# Altium PCB PCB_Logette connecté_2023-11-30.pcbdoc
Units mm, origin at the board's own origin, x right, y up, seen from the top; angles counter-clockwise.
Board outline 247.62 x 164.07 mm, 2 copper layers (Top Layer, Bottom Layer); 53 components, 73 nets, 275 pads, 114 vias.
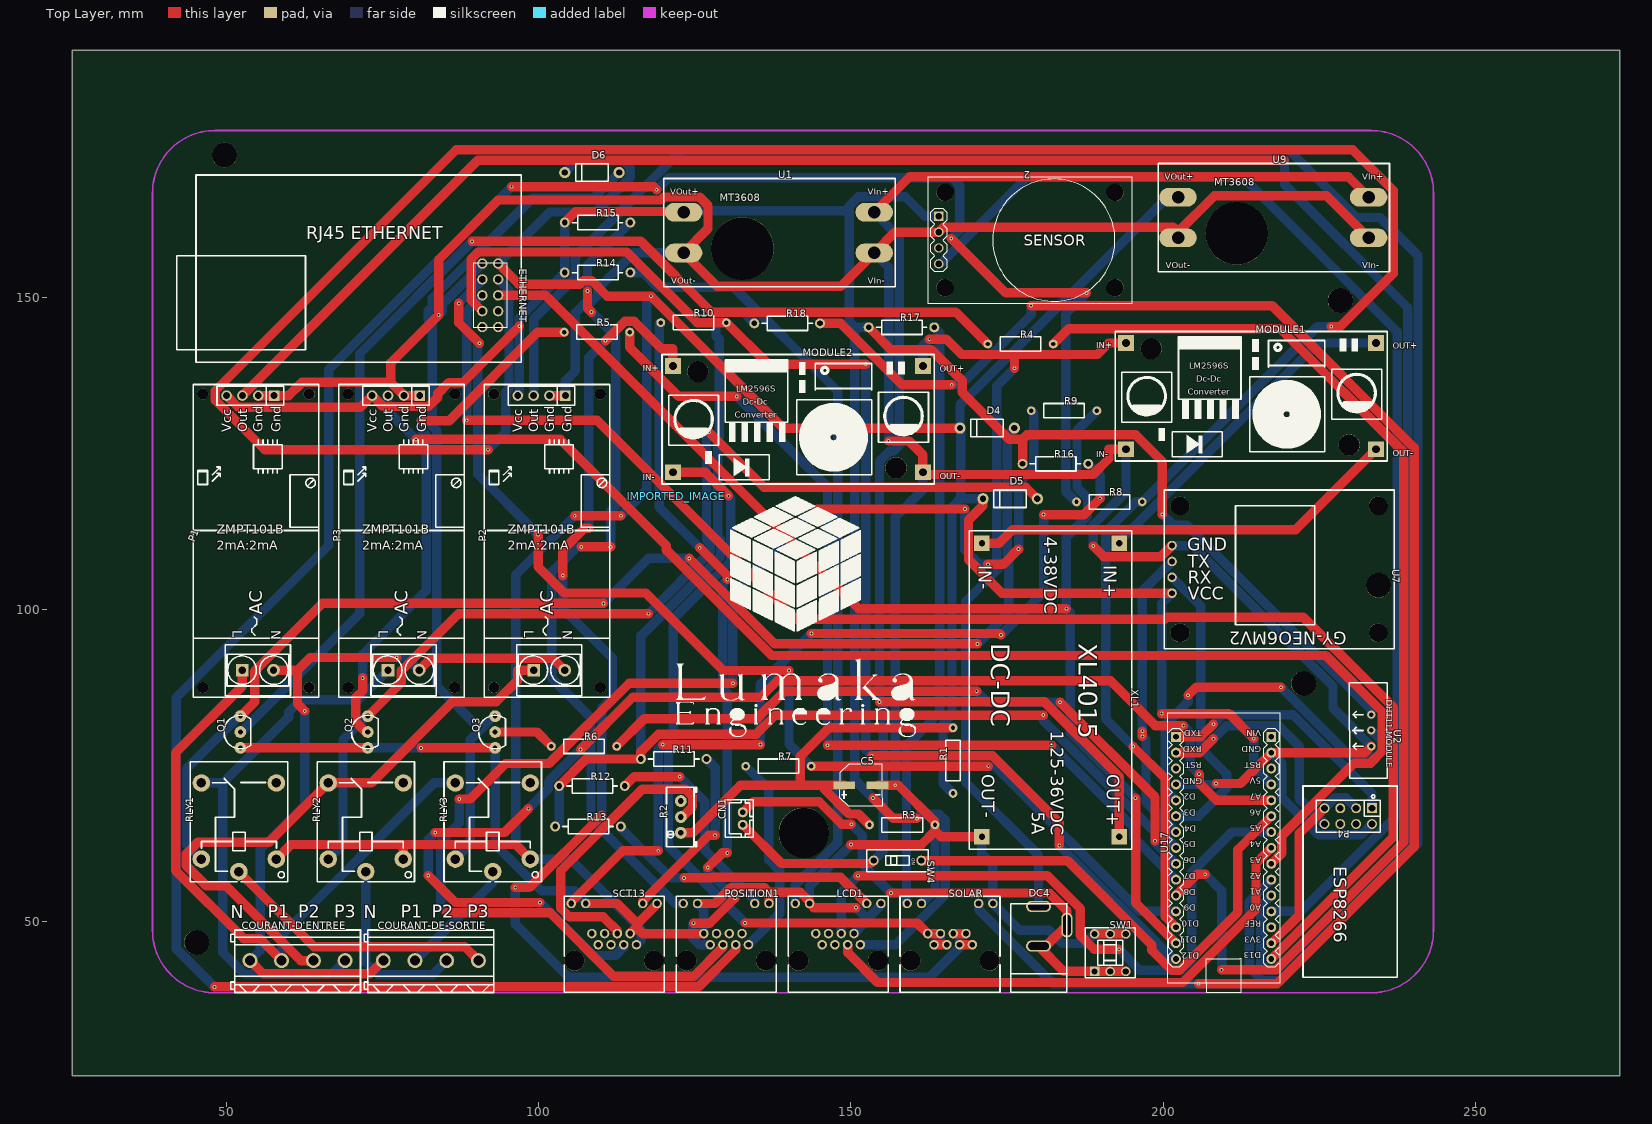
[diagram p0: Top Layer view]
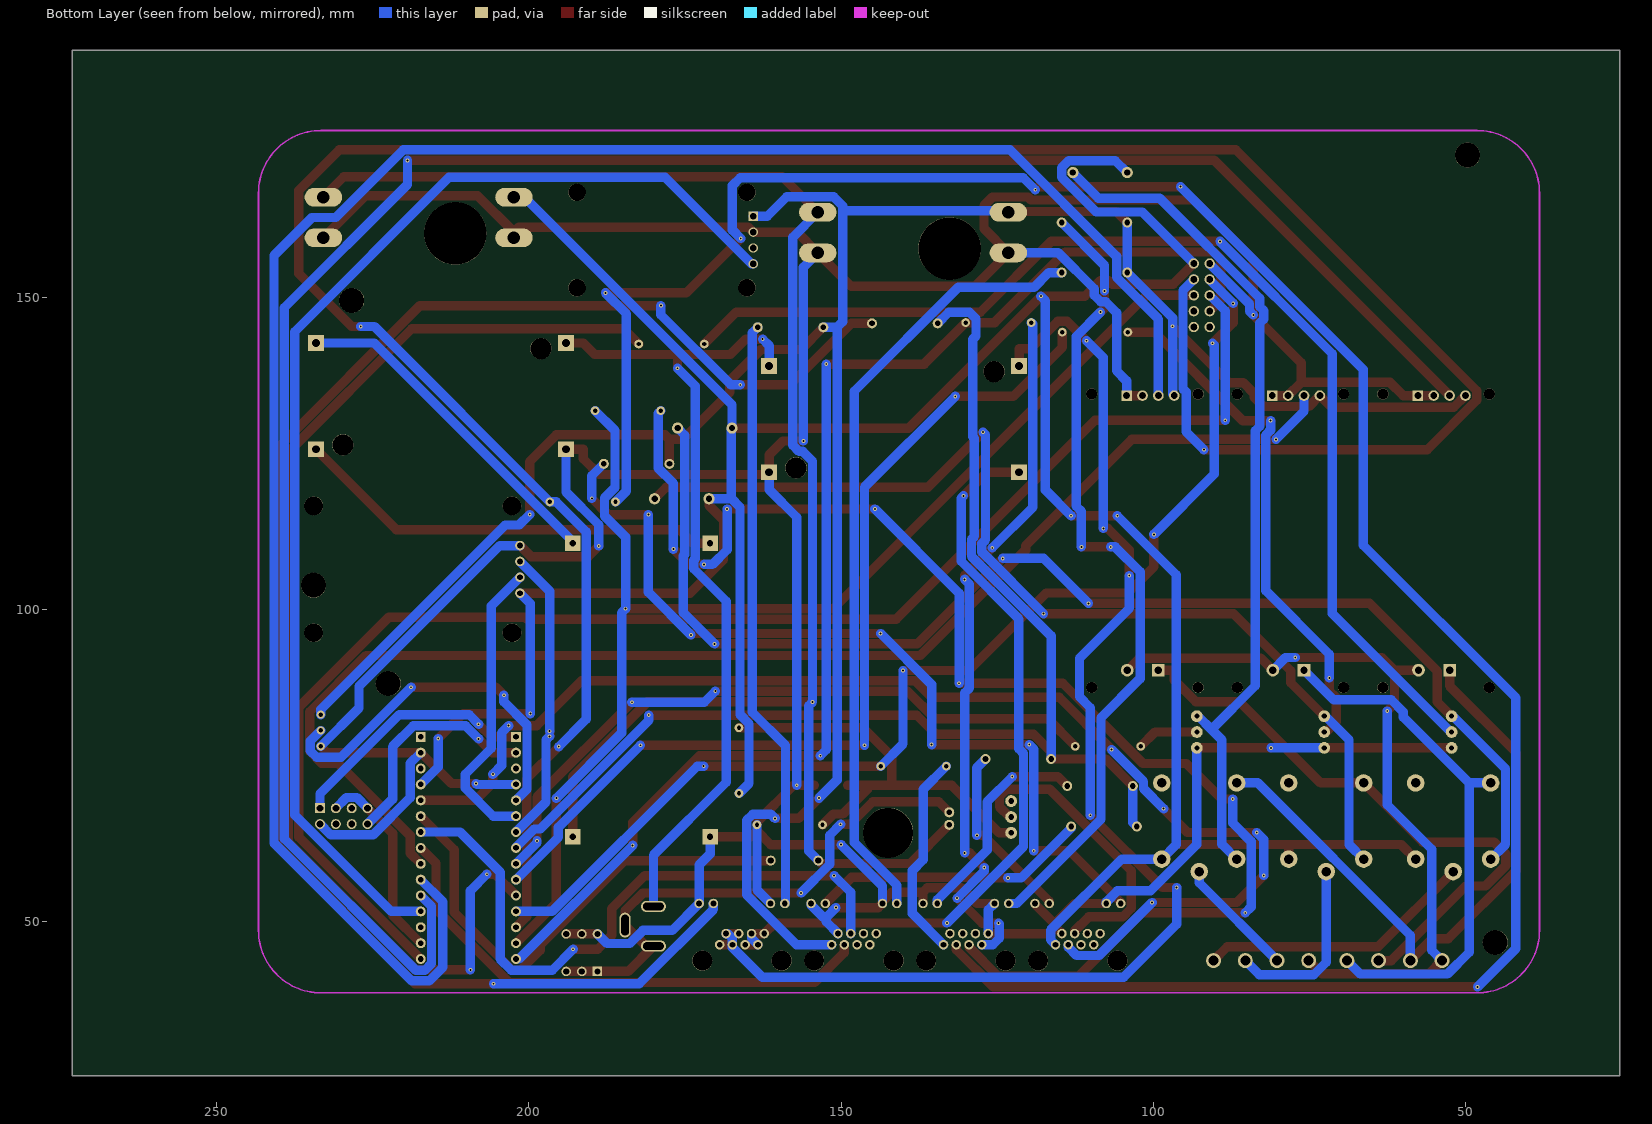
[diagram p1: Bottom Layer view, seen from below]

## Layer stack, top to bottom
Top Layer: signal copper (thickness not stored)
Dielectric: dielectric 0.32, FR-4, Dk 4.8
Bottom Layer: signal copper (thickness not stored)

## Board outline
273.016,25.4 25.4,25.4 25.4,189.469 273.016,189.469

## Components (designator, comment, footprint, x,y, rotation, side; value= is the part's Value field where it differs from the comment)
2 "GAS-SENSOR-MQ2" GAS-SENSOR-MQ2 178.656,159.116 r0 top
C5 "100uF" CAP-SMD_BD6.3-L6.6-W6.6-FD 151.605,71.867 r0 top
CN1 "B2B-PH-K-S(LF)(SN)" CONN-TH_B2B-PH-K-S 132.682,66.533 r90 top
COURANT-D'ENTREE "DB128L-5.0-4P-BU-S" CONN-TH_4P-5.00_DB128L-5.0-4P-BU-S 61.435,43.8 r0 top
COURANT-DE-SORTIE "DB128L-5.0-4P-BU-S" CONN-TH_4P-5.00_DB128L-5.0-4P-BU-S 82.771,43.8 r0 top
D4 "1N4007" DO-41_BD2.4-L4.7-P8.70-D0.9-RD 171.798,129.017 r0 top
D5 "1N4007" DO-41_BD2.4-L4.7-P8.70-D0.9-RD 175.481,117.714 r0 top
D6 "1N4007" DO-41_BD2.4-L4.7-P8.70-D0.9-RD 108.552,169.911 r0 top
DC4 "DC-072-165A" DC-IN-TH_DC-072-165A 182.296,49.293 r90 top
ETHERNET "W5100 Ethernet Shield" "W5100 ETHERNET MINI" 92.169,151.496 r270 top
IMPORTED_IMAGE "IMPORTED_IMAGE" IMPORTED_IMAGE 122.006,118.118 r0 top
LCD1 "MJ5688-Y011-GRNL1" RJ45-TH_MJ5688-Y011-GRNL1 147.941,49.642 r0 top
MODULE1 "LM2596S" LM2596S 213.327,133.335 r0 top
MODULE2 "LM2596S" LM2596S 140.81,129.652 r0 top
P1 "ZMPT101B-SHIELD COPY" ZMPT101B-MODULE 44.734,85.964 r90 top
P2 "ZMPT101B-SHIELD COPY" ZMPT101B-MODULE 91.343,85.964 r90 top
P3 "ZMPT101B-SHIELD COPY" ZMPT101B-MODULE 68.039,85.964 r90 top
P4 "ESP8266-TH8" HDR-TH_8P-P2.54-V-F-R2-C4-S2.54-1 229.583,66.914 r180 top
POSITION1 "MJ5688-Y011-GRNL1" RJ45-TH_MJ5688-Y011-GRNL1 130.024,49.642 r0 top
Q1 "BC547" TO92C 52.291,80.376 r90 top
Q2 "BC547" TO92C 72.674,80.376 r90 top
Q3 "BC547" TO92C 93.058,80.376 r90 top
R1 "10kΩ" RES-TH_BD2.3-L6.5-P10.50-D0.5 166.337,75.804 r90 top
R2 "100kΩ" RES-ADJ-TH_3P-L9.5-W4.9-P2.50-L_3296W 122.776,66.787 r90 top
R3 "10kΩ" RES-TH_BD2.3-L6.5-P10.50-D0.5 158.209,65.517 r0 top
R4 "10kΩ" RES-TH_BD2.3-L6.5-P10.50-D0.5 177.132,142.479 r0 top
R5 "10kΩ" RES-TH_BD2.3-L6.5-P10.50-D0.5 109.341,144.384 r0 top
R6 "10kΩ" RES-TH_BD2.3-L6.5-P10.50-D0.5 107.282,78.09 r0 top
R7 "10kΩ" RES-TH_BD2.3-L6.5-P10.50-D0.5 138.397,74.915 r0 top
R8 "10kΩ" RES-TH_BD2.3-L6.5-P10.50-D0.5 191.356,117.206 r0 top
R9 "10kΩ" RES-TH_BD2.3-L6.5-P10.50-D0.5 184.117,131.811 r0 top
R10 "10kΩ" RES-TH_BD2.3-L6.5-P10.50-D0.5 124.808,145.908 r0 top
R11 "220Ω" RES-TH_BD2.2-L6.5-P10.50-D0.6 121.633,76.058 r0 top
R12 "220Ω" RES-TH_BD2.2-L6.5-P10.50-D0.6 108.552,71.74 r0 top
R13 "220Ω" RES-TH_BD2.2-L6.5-P10.50-D0.6 107.917,65.263 r0 top
R14 "220Ω" RES-TH_BD2.2-L6.5-P10.50-D0.6 109.441,153.909 r0 top
R15 "220Ω" RES-TH_BD2.2-L6.5-P10.50-D0.6 109.441,161.91 r0 top
R16 "220Ω" RES-TH_BD2.2-L6.5-P10.50-D0.6 182.72,123.302 r0 top
R17 "220Ω" RES-TH_BD2.2-L6.5-P10.50-D0.6 158.082,145.146 r0 top
R18 "220Ω" RES-TH_BD2.2-L6.5-P10.50-D0.6 139.794,145.781 r0 top
RLY1 "SRD-05VDC-SL-C" RELAY-TH_SRD-XXVDC-XL-C 52.037,65.136 r90 top
RLY2 "SRD-05VDC-SL-C" RELAY-TH_SRD-XXVDC-XL-C 72.357,65.136 r90 top
RLY3 "SRD-05VDC-SL-C" RELAY-TH_SRD-XXVDC-XL-C 92.677,65.136 r90 top
SCT13 "MJ5688-Y011-GRNL1" RJ45-TH_MJ5688-Y011-GRNL1 112.108,49.642 r0 top
SOLAR "MJ5688-Y011-GRNL1" RJ45-TH_MJ5688-Y011-GRNL1 165.857,49.642 r0 top
SW1 "XKB8080-Z" SW-TH_6P-L8.0-W8.0-P2.50 191.483,45.07 r0 top
SW4 "DS-01RP_C319063" SW-TH_DS-01RP 157.447,59.802 r270 top
U1 "MT3608" MT3608 138.524,160.259 r0 top
U2 "DHT11 MODULE (3PIN)" "DHT11 MODULE 3P" 233.266,80.63 r270 top
U7 "GY-NEO6MV2" GY-NEO6MV2 201.389,110.221 r270 top
U9 "MT3608" MT3608 217.645,162.672 r0 top
U17 "ARDUINO_NANO" COMM-TH_ARDUINO_NANO 209.644,61.834 r90 top
XL1 "DC-DC XL4015" DC-DC_XL4015_5A 181.958,87.107 r270 top

## Footprints (in the part's own frame and the unit in brackets; to place one, negate y for a bottom-side part, rotate by r counter-clockwise, add the part's x,y. Pads: shape width x height; smd on the part's side, far side on the other; paste and mask are expansions set on the pad)
CAP-SMD_BD6.3-L6.6-W6.6-FD [mm]
  rect 3.5x1.2 smd paste+0 mask+0.051: 1(-2.67,0) 2(2.67,0)
  silkscreen extent -3.38,-3.38 3.38,3.38
COMM-TH_ARDUINO_NANO [mm]
  rect 1.6x1.6 hole 0.9 paste+0 mask+0.051: 1(17.78,7.62) 30(17.78,-7.62)
  round 1.6 hole 0.9 paste+0 mask+0.051: 2(15.24,7.62) 3(12.7,7.62) 4(10.16,7.62) 5(7.621,7.62) 6(5.08,7.62) 7(2.541,7.62) 8(0,7.62) 9(-2.539,7.62) 10(-5.08,7.62) 11(-7.619,7.62) 12(-10.16,7.62) 13(-12.699,7.62) 14(-15.24,7.62) 15(-17.78,7.62) 16(-17.78,-7.62) 17(-15.241,-7.62) 18(-12.7,-7.62) 19(-10.161,-7.62) 20(-7.62,-7.62) 21(-5.081,-7.62) 22(-2.54,-7.62) 23(-0.001,-7.62) 24(2.54,-7.62) 25(5.079,-7.62) 26(7.62,-7.62) 27(10.159,-7.62) 28(12.7,-7.62) 29(15.24,-7.62)
  silkscreen extent -23.11,-8.97 21.67,8.97
CONN-TH_4P-5.00_DB128L-5.0-4P-BU-S [mm]
  round 2.4 hole 1.6 paste+0 mask+0.051: 1(-7.62,0) 2(-2.54,0) 3(2.54,0) 4(7.62,0)
  silkscreen extent -10.67,-5.1 10.07,4.9
CONN-TH_B2B-PH-K-S [mm]
  round 1.6 hole 0.9 paste+0 mask+0.051: 1(1,0) 2(-1,0)
  silkscreen extent -3,-1.7 3,2.8
DC-DC_XL4015_5A [mm]
  rect 2.5x2.5 hole 1 paste+0 mask+0.051: 1(-23.5,11) 2(-23.5,-11) 3(23.5,11) 4(23.5,-11)
  silkscreen extent -25.5,-13 25.5,13
DC-IN-TH_DC-072-165A [mm]
  oval 1.8x4 hole 1.2 slot 3.3 at 90 deg paste+0 mask+0.051: 1(3.175,2.273) 2(-3.175,2.273)
  oval 4x1.8 hole 1.2 slot 3.3 at 0 deg paste+0 mask+0.051: 3(0.178,-2.273)
  silkscreen extent -10.59,-2.28 3.58,6.73
"DHT11 MODULE 3P" [mil]
  round 51 hole 28 paste+0 mask+4: 1(-100,0) 2(0,0) 3(100,0)
  silkscreen extent -300,-140 300,100
DO-41_BD2.4-L4.7-P8.70-D0.9-RD [mm]
  round 1.8 hole 1 paste+0 mask+0.051: 1(-4.35,0) 2(4.35,0)
  silkscreen extent -2.6,-1.4 2.6,1.4
GAS-SENSOR-MQ2 [mil]
  rect 59.37x59.37 hole 39.36 paste+0 mask+2: 1(-575,150)
  round 59.37 hole 39.36 paste+0 mask+2: 2(-575,50) 3(-575,-50) 4(-575,-150)
  round 110.24 hole 110.24 unplated paste+0: ""(-535,-300) ""(-535,300) ""(535,-300) ""(535,300)
  silkscreen extent -640,-400 640,400
GY-NEO6MV2 [mm]
  round 1.524 hole 0.914 paste+0 mask+0.051: 1(0,0) 2(2.54,0) 3(5.08,0) 4(7.62,0)
  round 3 hole 3 unplated paste+0: ""(-6.35,33.02) ""(-6.35,1.27) ""(13.97,33.02) ""(13.97,1.27)
  round 4 hole 4 unplated paste+0: ""(6.35,33.02)
  silkscreen extent -8.89,-1.27 16.51,35.56
HDR-TH_8P-P2.54-V-F-R2-C4-S2.54-1 [mm]
  rect 1.6x1.6 hole 1.1 paste+0 mask+0.051: 1(-3.81,-1.27)
  round 1.6 hole 1.1 paste+0 mask+0.051: 2(-3.81,1.27) 3(-1.27,-1.27) 4(-1.27,1.27) 5(1.27,-1.27) 6(1.27,1.27) 7(3.81,-1.27) 8(3.81,1.27)
  silkscreen extent -5.1,-3.42 5.1,2.55
IMPORTED_IMAGE [mm]
  silkscreen extent 0,-38.52 38.39,0
LM2596S [mm]
  rect 2.54x2.54 hole 1.27 paste+0 mask+0.102: 1(-19.3,9.3) 2(-19.3,-7.7) 3(20.7,9.3) 4(20.7,-7.7)
  round 3.4 hole 3.4 unplated paste+0: ""(-15.3,8.4) ""(16.4,-7)
  silkscreen extent -21.05,-9.58 22.51,11.15
MT3608 [mm]
  oval 6x3 hole 2 paste+0 mask+0.102: 1(15.2,-3.2) 2(15.2,3.3) 3(-15.3,-3.2) 4(-15.3,3.3)
  round 10 hole 10 unplated paste+0: ""(-5.9,-2.5)
  silkscreen extent -18.45,-8.6 18.55,8.7
RELAY-TH_SRD-XXVDC-XL-C [mil]
  round 110 hole 60 paste+0 mask+2: 1(-200.79,-236.22) 2(279.52,-236.2) 3(279.53,236.2) 4(-200.79,236.22) 5(-279.53,0)
  silkscreen extent -342,-307 413,307
RES-ADJ-TH_3P-L9.5-W4.9-P2.50-L_3296W [mm]
  round 1.9 hole 0.9 paste+0 mask+0.051: 1(-2.55,0) 2(-0.01,0) 3(2.55,0)
  silkscreen extent -4.75,-2.54 4.75,2.3
RES-TH_BD2.2-L6.5-P10.50-D0.6 [mm]
  round 1.6 hole 0.914 paste+0 mask+0.051: 1(-5.25,0) 2(5.25,0)
  silkscreen extent -4.06,-1.14 4.06,1.14
RES-TH_BD2.3-L6.5-P10.50-D0.5 [mm]
  round 1.4 hole 0.7 paste+0 mask+0.051: 1(-5.25,0) 2(5.25,0)
  silkscreen extent -3.25,-1.15 3.25,1.15
RJ45-TH_MJ5688-Y011-GRNL1 [mil]
  round 60 hole 36 paste+0 mask+1.97: 1(140.55,-129.92) 2(100.39,-59.84) 3(60.24,-129.92) 4(20.08,-59.84) 5(-20.08,-129.92) 6(-60.24,-59.84) 7(-100.39,-129.92) 8(-140.55,-59.84) 9(-270.08,129.92) 10(-179.92,129.92) 11(179.92,129.92) 12(270.08,129.92)
  round 125.98 hole 125.98 unplated paste+0: ""(-250,-229.92) ""(250,-229.92)
  silkscreen extent -315,-431 315,175
SW-TH_6P-L8.0-W8.0-P2.50 [mm]
  rect 1.524x1.524 hole 1 paste+0 mask+0.051: 1(-2.5,-3)
  round 1.524 hole 1 paste+0 mask+0.051: 2(0,-3) 3(2.5,-3) 4(-2.5,3) 5(0,3) 6(2.5,3)
  silkscreen extent -4,-4 4,4
SW-TH_DS-01RP [mm]
  round 1.6 hole 1 paste+0 mask+0.051: 1(0,-3.81) 2(0,3.81)
  silkscreen extent -1.75,-4.9 1.75,4.9
TO92C [mil]
  round 74 hole 32 paste+0 mask+2: 1(-100,0) 2(0,0) 3(100,0)
  silkscreen extent -105,-65 105,103
"W5100 ETHERNET MINI" [mil]
  round 65 hole 40 slot 40.2 at 0 deg paste+0 mask+2: 5V(-152,54) GND_1(-152,-46) GND_2(148,54) MI(148,-46) MO(48,54) NSS(-52,54) POE+(248,-46) POE-(248,54) RST(-52,-46) SOK(48,-46)
  silkscreen extent -710,-1970 470,200
ZMPT101B-MODULE [mil]
  rect 80x80 hole 46 paste+0 mask+2: 1(170,-310)
  round 80 hole 46 paste+0 mask+2: 2(170,-506)
  round 66.93 hole 43.31 paste+0 mask+2: 3(1900,-210)
  round 66.93 hole 43.31 paste+0 mask+4: 4(1900,-310) 5(1900,-410)
  rect 66.93x66.93 hole 43.31 paste+0 mask+4: 6(1900,-510)
  round 70.87 hole 70.87 unplated paste+0: ""(60,-60) ""(60,-730) ""(1910,-730) ""(1910,-60)
  silkscreen extent 0,-790 1970,0

## Free pads (board coordinates)
  round 4 hole 4 unplated paste+0: ""(45.306,46.721) ""(49.751,172.705) ""(222.471,88.123) ""(228.313,149.464)
  round 8 hole 8 unplated paste+0: ""(142.461,64.247)

## Via types
v1: diameter 0.61, hole 0.305, Top Layer to Bottom Layer, tented both sides, 114 vias

## Nets (pads, with @x,y where several pads share a name; then routed paths per layer and width w, separated by ;. In a path a pad name is that pad's centre, name@x,y a point inside that pad or via, vN(x,y) a via of type N, cw(c..) or ccw(c..) an arc to the next point about the centre after c; other vN are vias at no path point)
3V: P4.3 P4.7 U17.17 | length 31.6
  Top Layer w1.5: U17.17 221.768,51.098 221.768,64.179 P4.7
  Bottom Layer w1.5: P4.7 227.486,69.896 229.14,69.896 P4.3
12V: DC4.1 MODULE1.1 MODULE2.3 | length 134.6
  Top Layer w1.5: v1(162.543,143.252) 165.271,143.252 167.719,140.805 176.168,140.805 ; v1(176.168,138.591) 176.168,140.805 ; MODULE1.1 191.256,142.635 189.426,140.805 176.168,140.805
  Bottom Layer w1.5: MODULE2.3 161.51,142.219 v1(162.543,143.252) ; v1(176.168,138.591) 173.343,135.765 173.343,108.119 173.573,107.888 173.573,106.518 168.381,101.326 168.381,72.326 180.023,60.685 DC4.1
+: 2.1 LCD1.1 P1.3 P2.3 P3.3 R14.1 R15.1 R16.1 R17.1 U1.4 U2.1 | length 406.4
  Top Layer w1.5: P1.3 51.947,132.345 71.494,132.345 P3.3 75.128,132.469 82.364,132.469 83.897,134.003 83.897,134.573 85.606,136.282 87.886,136.282 v1(96.931,145.327) ; R15.1 105.972,163.69 123.092,163.69 U1.4 ; R17.1 156.379,141.599 162.825,141.599 167.791,136.633 167.791,134.764 175.342,127.213 177.47,127.213 ; v1(153.522,69.808) 156.77,66.56 v1(160.55,66.56) ; R16.1 177.47,127.213 ; v1@199.826,115.2 199.826,123.664 195.564,127.926 178.183,127.926 177.47,127.213
  Bottom Layer w1.5: P2.3 96.931,134.477 v1(96.931,145.327) 96.931,146.649 R14.1 R15.1 ; U1.4 123.475,163.809 149.719,163.809 ; LCD1.1 157.128,46.342 165.122,54.335 165.122,66.251 164.14,67.232 161.222,67.232 v1(160.55,66.56) ; R17.1 150.633,145.146 ; v1(153.522,69.808) 150.633,72.697 150.633,145.146 ; 2.1 161.796,162.926 158.689,166.033 151.191,166.033 149.719,164.561 149.719,163.809 ; v1@199.826,115.2 201.521,113.505 203.746,113.505 233.266,83.985 U2.1 ; 149.719,163.809 149.719,146.06 150.633,145.146
  other v1: 199.826,115.2
-: 2.2 C5.2 ETHERNET.GND_1 LCD1.2 LCD1.10 LCD1.12 MODULE1.2 MODULE2.4 P1.5 P1.6 P2.5 P2.6 P3.5 P3.6 P4.2 POSITION1.8 POSITION1.10 POSITION1.12 Q1.1 Q2.1 Q3.1 R3.2 SCT13.2 SCT13.10 SCT13.12 SOLAR.10 SOLAR.12 SW1.4 SW1.5 SW1.6 U1.1 U1.3 U2.3 U7.1 U9.1 U9.3 U17.4 U17.29 XL1.4 | length 787.9
  Top Layer w1.5: Q1.1 Q2.1 ; P1.5 P1.6 60.04,134.224 62.153,136.336 76.34,136.336 ; P3.6 P3.5 76.34,136.336 ; v1(81.188,77.836) Q3.1 ; P2.5 P2.6 ; SCT13.10 112.586,52.942 115.847,49.681 ; SCT13.2 115.464,48.928 115.847,48.928 ; SCT13.12 118.968,52.801 115.847,49.681 ; POSITION1.10 128.233,52.942 130.736,55.445 136.189,55.445 136.884,54.749 ; POSITION1.8 116.654,48.122 115.847,48.928 ; POSITION1.12 136.884,54.749 ; v1(149.992,62.355) 161.252,62.355 163.459,64.562 ; v1(150.807,52.277) 144.036,52.277 LCD1.10 143.371,53.276 141.898,54.749 136.884,54.749 ; C5.2 155.9,71.867 v1(157.086,71.867) 157.526,71.867 157.583,71.867 163.459,65.991 R3.2 163.459,64.562 ; v1(156.029,126.947) 159.285,126.947 161.51,124.722 MODULE2.4@161.51,122.171 ; MODULE2.4@161.51,121.952 MODULE2.4@161.51,122.171 ; XL1.4 164.414,63.607 163.459,64.562 ; v1(188.776,110.146) 190.47,108.453 199.621,108.453 U7.1 ; SW1.4 SW1.5 SW1.6 ; MODULE1.2 191.256,125.635 191.256,124.12 188.734,121.597 162.084,121.597 MODULE2.4@161.51,122.171 ; U9.3 U9.3@202.345,160.386 ; v1@208.431,72.146 212.336,72.146 U17.29 232.25,77.074 U2.3 ; U9.1 226.096,166.221 208.18,166.221 U9.3@202.345,160.386 ; 76.34,136.336 76.34,139.457 84.022,147.139 84.022,155.973 93.566,165.517 119.597,165.517 120.082,166.002 125.753,166.002 127.13,164.625 127.13,160.965 U1.3 128.555,151.728 148.393,151.728 U1.1 157.051,160.386 2.2 164.856,161.191 201.54,161.191 U9.3@202.345,160.386 ; 115.847,48.928 115.847,49.681
  Bottom Layer w1.5: Q2.1 v1(81.188,77.836) ; v1@84.022,147.139 84.63,147.747 84.63,148.891 91.001,155.262 ETHERNET.GND_1 ; Q3.1 93.058,62.382 100.48,54.961 105.772,54.961 107.538,53.194 SCT13.10 ; P2.6 104.297,136.575 105.906,138.184 105.906,147.483 107.655,149.232 108.435,149.232 109.488,150.285 109.488,151.331 115.216,157.059 U1.3 ; POSITION1.10 126.454,51.942 POSITION1.8 ; LCD1.10 143.371,55.734 v1(149.992,62.355) ; LCD1.2 152.381,50.012 152.381,50.702 ; v1(150.807,52.277) 152.381,50.702 ; U1.1 156.029,154.754 v1(156.029,126.947) ; LCD1.12 154.801,52.687 152.816,50.702 152.381,50.702 ; v1(157.086,71.867) 157.086,114.757 161.51,119.181 MODULE2.4@161.51,121.952 ; SOLAR.10 163.459,55.113 R3.2 ; XL1.4 170.958,60.856 172.717,59.097 SOLAR.12 177.026,48.633 181.708,48.633 183.814,46.527 187.44,46.527 SW1.4 ; v1(188.776,110.146) 188.776,113.538 194.027,118.789 194.027,122.864 MODULE1.2 ; U7.1 204.617,110.221 227.139,87.699 227.139,84.217 U2.3 ; U17.4 202.038,71.979 208.264,71.979 v1@208.431,72.146 ; U17.29 218.968,75.37 218.968,69.867 224.916,63.919 231.669,63.919 P4.2
  other v1: 208.431,72.146 84.022,147.139
A0: 2.4 U17.19 | length 193.3
  Bottom Layer w1.5: 2.4 164.325,155.306 178.176,169.157 212.735,169.157 237.436,144.456 237.436,67.109 222,51.674 U17.19
A1: P1.4 U17.20 | length 343.5
  Top Layer w1.5: P1.4 90.25,171.865 v1(219.391,171.865)
  Bottom Layer w1.5: U17.20 215.534,52.484 215.534,43.317 216.615,42.236 218.039,42.236 239.101,63.298 239.101,148.289 219.391,167.999 v1(219.391,171.865)
A2: P2.4 U17.21 | length 320.5
  Bottom Layer w1.5: P2.4 99.217,146.464 105.905,153.152 105.905,156.503 122.962,173.56 220.036,173.56 230.874,162.722 234.683,162.722 240.755,156.65 240.755,62.598 218.711,40.554 215.913,40.554 213.753,42.714 213.753,53.243 U17.21
A3: P3.4 U17.22 | length 215.2
  Top Layer w1.5: v1(80.396,127.218) 103.455,127.218 120.464,110.208 120.464,109.49 137.333,92.621 226.009,92.621 235.022,83.609 235.022,77.289 233.144,75.411 230.565,75.411 218.97,63.816 218.97,60.999 U17.22
  Bottom Layer w1.5: P3.4 75.913,131.701 v1(80.396,127.218)
A6: SW4.2 U17.25 | length 79.9
  Top Layer w1.5: SW4.2 184.645,59.802 198.149,46.298 198.149,45.449 201.348,42.251 202.631,42.251 211.89,51.51 211.89,61.54 U17.25
A7: SCT13.3 U17.26 | length 201.2
  Top Layer w1.5: v1(82.348,57.41) 86.659,53.099 v1(100.223,53.099) ; v1(83.467,64.306) 94.568,64.306 v1(98.374,68.112) ; v1(106.718,77.571) 115.084,85.938 135.561,85.938 138.193,88.57 191.543,88.57 198.701,81.412 v1(203.19,81.412) ; v1@205.713,73.633 205.713,72.251 208.511,69.454 U17.26
  Bottom Layer w1.5: v1(82.348,57.41) 82.348,63.187 v1(83.467,64.306) ; v1(98.374,68.112) 101.598,71.336 101.598,72.452 v1(106.718,77.571) ; v1(100.223,53.099) 108.701,44.621 112.3,44.621 113.638,45.959 SCT13.3 ; v1(203.19,81.412) 204.328,80.274 204.328,75.019 v1@205.713,73.633
  other v1: 205.713,73.633
B+: CN1.2 SW4.1 U1.2 U9.2 XL1.3 | length 267.5
  Top Layer w1.5: CN1.2 138.878,59.336 153.172,59.336 SW4.1 ; U1.2 159.399,169.233 229.583,169.233 U9.2 ; v1(154.563,85.2) 180.997,85.2 192.958,73.239 XL1.3
  Bottom Layer w1.5: SW4.1 155.176,61.34 155.176,84.587 v1(154.563,85.2) 154.563,123.72 156.137,125.293 156.714,125.293 157.708,126.287 157.708,159.575 U1.2
D3: U7.3 U17.6 | length 47.3
  Bottom Layer w1.5: U7.3 205.982,100.548 205.982,77.796 210.155,73.623 210.155,71.423 205.646,66.914 U17.6
D4: U7.2 U17.7 | length 47.5
  Top Layer w1.5: v1(196.646,79.692) v1(196.646,80.519)
  Bottom Layer w1.5: v1(196.646,79.692) 197.212,79.126 197.212,69.185 U17.7 ; v1(196.646,80.519) 196.646,102.938 U7.2
D4_2: D4.2 Q1.3 RLY1.4 | length 201.7
  Top Layer w1.5: Q1.3 54.581,85.205 54.581,90.132 65.422,100.974 v1(110.391,100.974) ; v1(124.12,108.173) 137.807,94.486 v1(170.237,94.486)
  Bottom Layer w1.5: RLY1.4 43.673,62.399 43.673,74.519 52.07,82.916 Q1.3 ; v1(110.391,100.974) 117.591,108.173 v1(124.12,108.173) ; v1(170.237,94.486) 175.227,99.475 175.227,108.573 175.012,108.788 175.012,127.881 D4.2
D5: R11.1 R12.1 R13.1 R18.1 U17.8 | length 203.8
  Top Layer w1.5: R12.1 107.62,76.058 R11.1 116.383,77.215 119.193,80.025 134.823,80.025 137.88,83.083 v1(180.775,83.083)
  Bottom Layer w1.5: R13.1 103.302,65.898 R12.1 ; R11.1 116.383,95.759 129.115,108.491 129.115,111.232 128.655,111.692 128.655,127.391 128.942,127.678 128.942,143.211 128.398,143.756 128.398,146.527 129.434,147.563 132.762,147.563 R18.1 ; v1(180.775,83.083) 180.775,82.239 198.153,64.861 199.101,64.861 202.024,61.939 U17.8
D9: ETHERNET.RST R7.2 U17.12 | length 184.8
  Top Layer w1.5: v1(87.247,148.974) 87.247,145.89 v1(90.545,142.592) ; v1(99.931,112.007) 99.931,106.821 104.125,102.628 117.156,102.628 129.56,90.224 v1(140.087,90.224) ; R7.2 v1(171.982,74.915)
  Bottom Layer w1.5: v1(87.247,148.974) 91.001,152.727 ETHERNET.RST ; v1(90.545,142.592) 90.274,142.321 90.274,121.664 v1(99.931,112.007) ; v1(140.087,90.224) 140.087,78.475 R7.2 ; v1(171.982,74.915) 173.009,74.915 196.25,51.674 U17.12
D10: ETHERNET.NSS R8.2 U17.13 | length 429.3
  Top Layer w1.5: v1(91.928,125.564) 56.2,125.564 48.259,133.505 48.259,134.988 86.833,173.561 230.281,173.561 236.79,167.053 236.79,153.769 228.306,145.285 v1(226.87,145.285) ; v1(195.184,78.041) 200.32,72.905 200.32,50.838 U17.13
  Bottom Layer w1.5: v1(91.928,125.564) 94.77,128.406 94.77,134.796 95.27,135.296 95.27,151.087 ETHERNET.NSS ; v1(195.184,78.041) 190.804,82.421 190.804,112.422 195.588,117.206 R8.2 224.685,145.285 v1(226.87,145.285)
D11: ETHERNET.MO R9.2 U17.14 | length 207.6
  Top Layer w1.5: ETHERNET.MO 101.104,150.276 151.264,100.117 v1(184.485,100.117) ; v1@195.558,69.794 195.558,53.059 U17.14
  Bottom Layer w1.5: R9.2 186.182,128.626 186.182,119.501 187.856,117.827 187.856,114.957 184.485,111.585 v1(184.485,100.117) 185.126,99.476 185.126,80.227 v1@195.558,69.794
  other v1: 195.558,69.794
D12: ETHERNET.MI R10.2 U17.15 | length 207.5
  Top Layer w1.5: ETHERNET.MI 89.223,149.514 89.223,156.07 90.355,157.202 114.133,157.202 125.428,145.908 R10.2 136.703,139.262 v1(152.374,139.262) ; v1(153.318,76.588) 172.651,76.588 183.345,65.894 v1(183.345,62.24)
  Bottom Layer w1.5: v1(152.374,139.262) 152.374,77.531 v1(153.318,76.588) ; v1(183.345,62.24) 201.531,44.054 U17.15
D13: ETHERNET.SOK U17.16 | length 237
  Top Layer w1.5: v1(88.517,130.261) 109.359,130.261 141.193,98.427 200.219,98.427 200.564,98.772 222.359,98.772 236.761,84.369 236.761,63.551 U17.16
  Bottom Layer w1.5: v1(88.517,130.261) 88.517,147.793 ETHERNET.SOK
DATA: U2.2 U17.5 | length 59.6
  Top Layer w1.5: v1(203.954,86.264) 205.236,87.546 v1(218.806,87.546)
  Bottom Layer w1.5: U17.5 200.258,71.219 200.258,81.518 203.954,85.214 v1(203.954,86.264) ; v1(218.806,87.546) 230.019,76.332 233.921,76.332 234.951,77.363 234.951,78.944 U2.2
DC4_2: CN1.1 DC4.2 DC4.3 SW1.1 SW1.2 SW1.3 | length 86.4
  Top Layer w1.5: CN1.1 134.357,69.208 144.929,69.208 148.521,65.615 v1(150.068,65.615) ; v1(156.397,54.621) 181.711,54.621 184.569,51.763 DC4.3 181.217,46.118 DC4.2 184.071,42.07 SW1.1 SW1.2 SW1.3
  Bottom Layer w1.5: v1(150.068,65.615) 151.812,63.871 151.812,59.206 v1(156.397,54.621)
LCD1_5: LCD1.5
LCD1_6: LCD1.6
LCD1_7: LCD1.7
LCD1_8: LCD1.8
LCD1_9: LCD1.9 R14.2 | length 125.9
  Bottom Layer w1.5: R14.2 116.745,153.909 119.115,151.539 131.263,151.539 147.892,134.91 147.892,62.693 141.081,55.881 LCD1.9
LCD1_11: LCD1.11 R13.2 | length 44.7
  Top Layer w1.5: v1(123.294,57.035) 127.765,57.035 127.846,57.116 148.336,57.116 LCD1.11
  Bottom Layer w1.5: R13.2 113.167,65.016 121.148,57.035 v1(123.294,57.035)
MODULE1_3: MODULE1.3 XL1.1 | length 54.5
  Bottom Layer w1.5: XL1.1 192.958,110.896 224.696,142.635 MODULE1.3
MODULE1_4: MODULE1.4 XL1.2 | length 69.3
  Top Layer w1.5: XL1.2 173.709,110.607 175.883,112.781 221.173,112.781 MODULE1.4@234.027,125.635
N: COURANT-D'ENTREE.1 COURANT-DE-SORTIE.1 P1.2 P2.2 P3.2 | length 123.6
  Top Layer w1.5: COURANT-D'ENTREE.1 55.936,41.679 73.03,41.679 COURANT-DE-SORTIE.1 ; P1.2 61.434,90.282 ; v1(62.593,83.738) 61.434,84.898 61.434,90.282 ; v1(77.306,92.31) 63.462,92.31 61.434,90.282 ; P3.2 82.811,92.202 102.276,92.202 P2.2
  Bottom Layer w1.5: COURANT-D'ENTREE.1 55.469,45.453 55.469,61.611 62.593,68.736 v1(62.593,83.738) ; v1(77.306,92.31) 78.863,92.31 P3.2
P1: COURANT-D'ENTREE.2 P1.1 RLY3.3 | length 101.4
  Top Layer w1.5: P1.1 52.608,87.765 41.924,77.081 41.924,58.207 52.846,47.285 55.409,47.285 COURANT-D'ENTREE.2
  Bottom Layer w1.5: COURANT-D'ENTREE.2 58.895,47.843 83.287,72.236 RLY3.3
P2: COURANT-D'ENTREE.3 P2.1 RLY2.3 | length 97.2
  Top Layer w1.5: COURANT-D'ENTREE.3 61.956,43.8 50.021,55.735 46.861,55.735 43.643,58.953 43.643,60.902 45.509,62.769 56.891,62.769 RLY2.3 73.249,72.236 86.235,85.221 93.213,85.221 96.701,88.709 96.701,90.282 P2.1
P3: COURANT-D'ENTREE.4 P3.1 RLY1.3 | length 86.8
  Bottom Layer w1.5: RLY1.3 49.473,72.236 ; COURANT-D'ENTREE.4 66.901,41.646 52.962,41.646 49.473,45.135 49.473,72.236 ; P3.1 71.169,85.538 61.964,85.538 60.01,83.584 60.01,82.773 49.473,72.236
POSITION1_2: POSITION1.2
POSITION1_4: POSITION1.4
POSITION1_6: POSITION1.6
POSITION1_9: POSITION1.9 R15.2 | length 130.5
  Top Layer w1.5: v1(106.832,110.013) v1(111.532,110.013) ; v1(107.834,150.97) 107.834,148.224 v1(108.481,147.578)
  Bottom Layer w1.5: v1(106.832,110.013) 106.137,110.013 102.144,106.02 102.144,88.931 108.405,82.671 108.405,66.43 121.893,52.942 POSITION1.9 ; v1(107.834,150.97) 107.834,155.053 R15.2 ; v1(108.481,147.578) 112.37,143.689 112.37,116.516 111.532,115.678 v1(111.532,110.013)
POSITION1_11: POSITION1.11 R12.2 | length 34.7
  Top Layer w1.5: R12.2 115.301,73.239 v1(122.606,73.239)
  Bottom Layer w1.5: v1(122.606,73.239) 126.603,69.241 126.603,61.504 134.594,53.513 POSITION1.11
R1: COURANT-DE-SORTIE.2 RLY3.5 | length 19.4
  Bottom Layer w1.5: COURANT-DE-SORTIE.2 92.677,56.246 RLY3.5
R2: COURANT-DE-SORTIE.3 RLY2.5 | length 29.2
  Bottom Layer w1.5: RLY2.5 72.357,43.524 74.344,41.537 83.049,41.537 COURANT-DE-SORTIE.3
R2_1: C5.1 R1.2 R2.1 R3.1 | length 70.5
  Top Layer w1.5: R2.1 124.682,64.237 132.312,71.867 141.911,71.867 ; C5.1 145.684,71.867 ; R3.1 151.206,67.269 149.7,67.269 145.684,71.285 145.684,71.867 ; R1.2 146.47,81.054 141.911,76.495 141.911,71.867 ; 141.911,71.867 145.684,71.867
R3: COURANT-DE-SORTIE.4 RLY1.5 | length 44.3
  Top Layer w1.5: RLY1.5 64.074,45.998 88.192,45.998 COURANT-DE-SORTIE.4
R4_1: Q1.2 R4.1 | length 183.3
  Top Layer w1.5: v1(89.363,158.895) 116.388,158.895 127.721,147.562 166.799,147.562 R4.1
  Bottom Layer w1.5: Q1.2 52.41,80.376 71.377,99.343 71.377,140.909 v1(89.363,158.895)
R5_1: Q2.2 R5.1 | length 84.5
  Top Layer w1.5: v1(71.855,89.043) 71.855,87 70.743,85.888 70.743,81.998 72.365,80.376 Q2.2 ; v1(81.256,130.221) 85.731,130.221 99.894,144.384 R5.1
  Bottom Layer w1.5: v1(71.855,89.043) 71.855,92.818 82.05,103.013 82.05,127.903 81.256,128.696 v1(81.256,130.221)
R6_1: Q3.2 R6.1 | length 9.9
  Top Layer w1.5: Q3.2 99.746,80.376 R6.1
R7_1: POSITION1.1 R7.1 | length 32.9
  Bottom Layer w1.5: R7.1 136.871,71.19 136.871,59.932 138.587,58.217 138.587,51.334 POSITION1.1
R8_1: POSITION1.3 R8.1 | length 382.6
  Top Layer w1.5: v1(48.14,39.594) 125.607,39.594 131.554,45.542 POSITION1.3 ; v1(95.674,167.656) 118.426,167.656 v1(118.912,167.171) ; v1(166.048,159.368) 174.765,150.651 v1@187.699,150.651
  Bottom Layer w1.5: v1(48.14,39.594) 42.004,45.73 42.004,85.855 66.42,110.271 66.42,138.402 v1(95.674,167.656) ; v1(118.912,167.171) 120.844,169.103 166.134,169.103 167.392,167.845 167.392,160.712 v1(166.048,159.368) ; R8.1 184.351,118.961 184.351,147.303 v1(187.699,150.651)
R9_1: POSITION1.5 R9.1 | length 219.6
  Top Layer w1.5: v1@85.312,51.445 101.877,51.445 112.051,41.271 124.827,41.271 129.514,45.959 POSITION1.5 ; v1(87.317,69.669) 89.076,69.669 94.744,75.337 101.682,75.337 114.524,88.179 v1(131.108,88.179) ; v1(144.585,116.08) v1(168.229,116.08) ; v1(171.92,107.203) 174.372,107.203 v1(176.825,109.657)
  Bottom Layer w1.5: v1@85.312,51.445 84.376,52.382 84.376,62.876 87.317,65.817 v1(87.317,69.669) ; v1(131.108,88.179) 131.108,102.603 v1(144.585,116.08) ; v1(168.229,116.08) 168.229,109.558 170.584,107.203 v1(171.92,107.203) ; v1(176.825,109.657) 176.825,120.19 179.273,122.638 179.273,131.404 R9.1
  other v1: 85.312,51.445
R10_1: POSITION1.7 R10.1 | length 114.9
  Top Layer w1.5: v1(124.801,49.788) 127.418,49.788 v1(131.421,53.791) ; v1(125.807,109.862) 130.215,105.454 v1(130.215,104.801) ; v1(127.08,58.689) 129.423,61.033 v1(130.215,61.033)
  Bottom Layer w1.5: R10.1 119.336,145.686 119.336,116.333 v1(125.807,109.862) ; v1(124.801,49.788) 124.669,49.656 124.669,47.394 125.721,46.342 POSITION1.7 ; v1(127.08,58.689) 127.079,58.132 v1(131.421,53.791) ; v1(130.215,61.033) 130.215,86.666 129.454,87.428 129.454,104.039 v1(130.215,104.801)
R17_2: R17.2 SOLAR.9 | length 94.8
  Bottom Layer w1.5: SOLAR.9 158.897,53.042 158.897,78.231 164.197,83.531 164.197,144.281 R17.2
RDX: P4.1 U17.1 | length 40.4
  Top Layer w1.5: U17.1 204.325,79.614 205.982,79.614 v1(208,81.632)
  Bottom Layer w1.5: v1(208,81.632) 209.516,83.147 220.73,83.147 233.393,70.484 P4.1
RLY: D4.1 D5.1 D6.1 ETHERNET.5V R1.1 RLY1.1 RLY2.1 RLY3.1 SCT13.1 U7.4 U9.4 U17.27 | length 506.6
  Top Layer w1.5: RLY1.1 60.375,62.374 78.357,62.374 ; RLY2.1 78.357,62.374 ; ETHERNET.5V 96.829,152.068 106.593,152.068 107.149,152.624 108.52,152.624 111.008,150.135 v1(118.02,150.135) 139.138,129.017 D4.1 ; RLY3.1 96.339,62.374 78.357,62.374 ; v1(105.785,114.993) v1(113.185,114.993) ; D5.1 171.131,116.643 168.804,114.316 168.804,107.98 174.183,102.601 U7.4 ; v1(199.731,83.33) 210.489,83.33 v1(214.467,79.352)
  Bottom Layer w1.5: ETHERNET.5V 101.798,163.614 109.159,163.614 114.706,169.161 114.706,170.693 113.585,171.814 106.105,171.814 D6.1 ; v1(105.785,114.993) 96.346,105.554 96.346,62.366 RLY3.1 105.102,60.036 116.46,48.678 116.46,47.124 SCT13.1 ; v1(113.185,114.993) 117.302,119.11 117.302,149.418 v1(118.02,150.135) ; R1.1 164.729,72.162 164.729,81.719 166.178,83.168 166.178,116.368 167.544,117.733 ; D5.1 171.111,117.733 167.544,117.733 ; v1(199.731,83.33) 199.731,100.943 U7.4 ; U9.4 200.681,165.972 167.448,132.739 D4.1 167.544,128.921 167.544,117.733 ; v1(214.467,79.352) 214.467,74.791 U17.27
RLY1: R6.2 U17.9 | length 108.9
  Top Layer w1.5: R6.2 116.969,82.527 134.985,82.527 139.375,86.916 v1(170.123,86.916) ; v1(183.472,85.143) 198.652,69.964 v1(198.652,62.972)
  Bottom Layer w1.5: v1(170.123,86.916) 171.896,85.143 v1(183.472,85.143) ; v1(198.652,62.972) 198.652,62.666 U17.9
RLY2: R5.2 U17.10 | length 150.3
  Top Layer w1.5: R5.2@114.591,144.384 114.591,141.931 122.427,134.094 v1(131.722,134.094) ; v1(146.239,78.261) v1(182.108,78.261)
  Bottom Layer w1.5: v1(131.722,134.094) 146.239,119.577 v1(146.239,78.261) ; v1(182.108,78.261) 195.257,65.113 195.257,63.521 U17.10
RLY2_4: D5.2 Q2.3 RLY2.4 | length 168.9
  Top Layer w1.5: Q2.3 78.042,88.283 78.042,90.178 87.184,99.32 v1(117.605,99.32) ; v1(127.289,128.364) 136.088,119.565 177.98,119.565 D5.2
  Bottom Layer w1.5: RLY2.4 68.702,62.381 68.702,79.148 72.469,82.916 Q2.3 ; v1(117.605,99.32) 127.461,109.176 127.461,110.547 126.88,111.128 126.88,127.955 v1(127.289,128.364)
RLY3: R4.2 U17.11 | length 187.7
  Top Layer w1.5: R4.2 184.828,144.925 218.711,144.925 238.45,125.186 238.45,62.746 218.025,42.321 v1(209.319,42.321) ; U17.11 205.422,57.612 v1(206.692,57.612)
  Bottom Layer w1.5: v1(206.692,57.612) 209.319,54.985 v1(209.319,42.321)
RLY3_4: D6.2 Q3.3 RLY3.4 | length 136.6
  Bottom Layer w1.5: 82.976,149.576 82.976,148.432 82.368,147.824 82.368,146.454 82.976,145.846 82.976,129.315 83.704,128.588 83.704,87.791 90.715,80.78 ; 82.976,149.577 82.976,149.786 99.024,165.834 108.825,165.834 D6.2 ; RLY3.4 89.054,62.412 89.054,79.118 90.715,80.78 ; Q3.3 92.851,82.916 90.715,80.78
S$8356: 
SCL: LCD1.4 U17.24 | length 102.6
  Top Layer w1.5: v1(151.109,57.389) 181.435,57.389 186.723,52.101 186.723,47.828 188.941,45.61 v1(192.88,45.61)
  Bottom Layer w1.5: LCD1.4 148.451,54.732 v1(151.109,57.389) ; v1(192.88,45.61) 196.23,42.26 202.758,42.26 204.564,44.066 204.564,57.958 210.98,64.374 U17.24
SCT013: R2.2 SCT13.4 | length 48.2
  Top Layer w1.5: SCT13.4 112.618,48.539 110.369,50.788 104.934,50.788 103.556,52.167 103.556,58.178 116.618,71.241 123.498,71.241 124.636,70.103 124.636,68.397 123.015,66.777 R2.2
SCT13_5: SCT13.5
SCT13_6: SCT13.6
SCT13_7: SCT13.7
SCT13_8: SCT13.8
SCT13_9: R16.2 SCT13.9 | length 140.6
  Top Layer w1.5: SCT13.9 105.248,53.139 113.475,61.366 v1(119.155,61.366) ; v1(119.878,78.371) v1@135.508,78.371 ; v1(143.663,96.139) 173.799,96.139 v1(174.014,95.924) ; v1(180.828,115.173) 187.276,115.173 v1(189.884,117.781)
  Bottom Layer w1.5: v1(119.155,61.366) 119.155,77.648 v1(119.878,78.371) ; v1@135.508,78.371 135.508,87.984 v1(143.663,96.139) ; v1(174.014,95.924) 180.828,102.737 v1(180.828,115.173) ; R16.2 189.884,121.388 v1(189.884,117.781)
  other v1: 135.508,78.371
SCT13_11: R11.2 SCT13.11 | length 29.1
  Top Layer w1.5: SCT13.11 116.678,53.287 127.241,63.85 v1(128.257,63.85)
  Bottom Layer w1.5: R11.2 128.257,74.684 v1(128.257,63.85)
SDA: LCD1.3 U17.23 | length 84.3
  Top Layer w1.5: LCD1.3 149.471,45.077 154.254,40.294 203.088,40.294 214.815,52.02 214.815,59.384 U17.23
SOLAR+: MODULE2.1 SOLAR.1 SOLAR.2 SOLAR.3 SOLAR.4 | length 207.8
  Top Layer w1.5: v1(96.284,55.496) 98.536,55.496 v1(110.106,67.067) ; v1(103.876,105.413) 103.876,109.509 107.331,112.965 v1(108.027,112.965) ; v1(110.716,143.004) 113.84,146.129 115.296,146.129 119.702,141.722 121.51,141.722 MODULE2.1 ; SOLAR.4 SOLAR.2 ; SOLAR.3 SOLAR.1
  Bottom Layer w1.5: v1(96.284,55.496) 96.284,49.635 104.765,41.154 162.639,41.154 167.387,45.903 SOLAR.3 167.387,47.38 168.129,48.122 SOLAR.2 ; v1(103.876,105.413) 103.876,100.17 111.846,92.2 111.846,86.01 110.106,84.271 v1(110.106,67.067) ; v1(108.027,112.965) 108.027,140.316 v1(110.716,143.004)
SOLAR-: MODULE2.2 SOLAR.5 SOLAR.6 SOLAR.7 SOLAR.8 | length 124.4
  Top Layer w1.5: MODULE2.2 126.639,121.952 v1(130.407,118.184) ; v1(133.055,49.818) 160.591,49.818 SOLAR.8 SOLAR.6 ; SOLAR.7 SOLAR.5
  Bottom Layer w1.5: v1(130.407,118.184) 130.769,117.822 130.769,107.693 121.532,98.456 121.532,77.686 120.809,76.963 120.809,62.063 v1(133.055,49.818) ; SOLAR.7 164.327,47.362 SOLAR.6
SOLAR_11: R18.2 SOLAR.11 | length 263.2
  Top Layer w1.5: R18.2 148.352,145.781 158.185,135.948 v1(166.137,135.948) ; v1(178.84,148.623) 217.4,148.623 240.13,125.892 240.13,62.042 218.184,40.096 v1(205.621,40.096)
  Bottom Layer w1.5: v1(166.137,135.948) 167.632,135.948 178.84,147.155 v1(178.84,148.623) ; SOLAR.11 170.427,51.993 182.324,40.096 v1(205.621,40.096)
TXD: P4.8 U17.2 | length 37
  Top Layer w1.5: U17.2 205.781,77.074 v1(208,79.293)
  Bottom Layer w1.5: v1(208,79.293) 210.087,81.38 218.435,81.38 221.773,78.042 221.773,69.644 P4.8
U17_30: U17.30
pads on no net: 2. 2.3 ETHERNET.GND_2 ETHERNET.POE+ ETHERNET.POE- LCD1. MODULE1. MODULE2. P1. P2. P3. P4.4 P4.5 P4.6 POSITION1. R2.3 RLY1.2 RLY2.2 RLY3.2 SCT13. SOLAR. U1. U7. U9. U17.3 U17.18 U17.28

## Keep-outs
Keep-Out Layer:
  lines w0.254: 38.227,48.642 ccw(c48.227,48.642) 48.227,38.642 ; 38.227,166.642 cw(c48.227,166.642) 48.227,176.642 ; 233.227,38.642 ccw(c233.227,48.642) 243.227,48.642 ; 233.227,176.642 cw(c233.227,166.642) 243.227,166.642

## Silkscreen, mask and mechanical layers (free items; w line width, h text height)
Top Overlay:
  lines w0.254 net S$8356: 222.344,41.133 222.344,71.74 237.457,71.74 237.457,41.133 222.344,41.133
  text "RJ45 ETHERNET" at 62.832,159.243 h2.03
  text "ESP8266" at 227.297,58.913 h2.03 r270
  text "N" at 52.799,52.69 h2.03 r180
  text "N" at 74.135,52.69 h2.03 r180
  text "P1" at 56.634,50.658 h2.03
  text "P2" at 61.54,50.658 h2.03
  text "P3" at 67.277,50.658 h2.03
  text "P1" at 77.97,50.658 h2.03
  text "P2" at 82.876,50.658 h2.03
  text "P3" at 88.613,50.658 h2.03

## Text inside footprints (layer, text, board x,y; h text height)
2: Top Overlay "SENSOR" at 177.665,158.227 h1.78
MODULE1: Top Overlay "IN-" at 189.227,124.335 h1; Top Overlay "IN+" at 189.227,141.835 h1; Top Overlay "OUT-" at 236.727,124.535 h1; Top Overlay "OUT+" at 236.727,141.735 h1; Top Overlay "Dc-Dc" at 205.227,136.435 h1; Top Overlay "Converter" at 203.927,134.335 h1
MODULE2: Top Overlay "IN-" at 116.71,120.652 h1; Top Overlay "IN+" at 116.71,138.152 h1; Top Overlay "OUT-" at 164.21,120.852 h1; Top Overlay "OUT+" at 164.21,138.052 h1; Top Overlay "Dc-Dc" at 132.71,132.752 h1; Top Overlay "Converter" at 131.41,130.652 h1
P1: Top Overlay "ZMPT101B / 2mA:2mA" at 48.491,109.111 h2.5; Top Overlay "Gnd" at 58.748,128.382 h1.5 r90; Top Overlay "Gnd" at 55.898,128.382 h1.5 r90; Top Overlay "Out" at 53.358,128.382 h1.5 r90; Top Overlay "Vcc" at 50.818,128.382 h1.5 r90; Top Overlay "AC" at 55.748,99.172 h2.03 r90; Top Overlay "N" at 57.248,96.632 h1.5 r270; Top Overlay "L" at 51.096,96.632 h1.5 r270
P2: Top Overlay "ZMPT101B / 2mA:2mA" at 95.1,109.111 h2.5; Top Overlay "Gnd" at 105.357,128.382 h1.5 r90; Top Overlay "Gnd" at 102.507,128.382 h1.5 r90; Top Overlay "Out" at 99.967,128.382 h1.5 r90; Top Overlay "Vcc" at 97.427,128.382 h1.5 r90; Top Overlay "AC" at 102.357,99.172 h2.03 r90; Top Overlay "N" at 103.857,96.632 h1.5 r270; Top Overlay "L" at 97.705,96.632 h1.5 r270
P3: Top Overlay "ZMPT101B / 2mA:2mA" at 71.796,109.111 h2.5; Top Overlay "Gnd" at 82.053,128.382 h1.5 r90; Top Overlay "Gnd" at 79.203,128.382 h1.5 r90; Top Overlay "Out" at 76.663,128.382 h1.5 r90; Top Overlay "Vcc" at 74.123,128.382 h1.5 r90; Top Overlay "AC" at 79.052,99.172 h2.03 r90; Top Overlay "N" at 80.553,96.632 h1.5 r270; Top Overlay "L" at 74.401,96.632 h1.5 r270
SW4: Top Overlay "ON" at 159.693,60.202 h0.51 r270; Document "1" at 154.272,60.056 h0.51 r90
U1: Top Overlay "VOut-" at 121.274,152.159 h1; Top Overlay "VOut+" at 121.074,166.359 h1; Top Overlay "VIn+" at 152.675,166.358 h1; Top Overlay "VIn-" at 152.674,152.16 h1
U2: Top Overlay "DHT11 MODULE" at 235.687,85.583 h1 r270
U7: Top Overlay "GND" at 203.817,109.367 h2.03; Top Overlay "TX" at 203.929,106.665 h2.03; Top Overlay "RX" at 203.929,104.125 h2.03; Top Overlay "VCC" at 203.929,101.585 h2.03
U9: Top Overlay "VOut-" at 200.395,154.572 h1; Top Overlay "VOut+" at 200.195,168.772 h1; Top Overlay "VIn+" at 231.796,168.771 h1; Top Overlay "VIn-" at 231.795,154.573 h1
U17: Top Overlay "D13" at 215.634,45.102 h1 r180; Top Overlay "3V3" at 215.634,47.642 h1 r180; Top Overlay "REF" at 215.634,50.182 h1 r180; Top Overlay "A0" at 215.634,52.722 h1 r180; Top Overlay "A1" at 215.634,55.262 h1 r180; Top Overlay "A2" at 215.634,57.802 h1 r180; Top Overlay "A3" at 215.634,60.342 h1 r180; Top Overlay "A4" at 215.634,62.882 h1 r180; Top Overlay "A5" at 215.634,65.422 h1 r180; Top Overlay "A6" at 215.634,67.962 h1 r180; Top Overlay "A7" at 215.634,70.502 h1 r180; Top Overlay "5V" at 215.634,73.042 h1 r180; Top Overlay "RST" at 215.634,75.582 h1 r180; Top Overlay "GND" at 215.634,78.122 h1 r180; Top Overlay "VIN" at 215.634,80.662 h1 r180; Top Overlay "D12" at 205.745,45.082 h1 r180; Top Overlay "D11" at 205.336,47.622 h1 r180; Top Overlay "D10" at 205.745,50.162 h1 r180; Top Overlay "D9" at 205.171,52.702 h1 r180; Top Overlay "D8" at 205.217,55.242 h1 r180; Top Overlay "D7" at 205.217,57.782 h1 r180; Top Overlay "D6" at 205.171,60.322 h1 r180; Top Overlay "D5" at 205.217,62.862 h1 r180; Top Overlay "D4" at 205.262,65.402 h1 r180; Top Overlay "D3" at 205.217,67.942 h1 r180; Top Overlay "D2" at 205.217,70.482 h1 r180; Top Overlay "GND" at 206.2,73.022 h1 r180; Top Overlay "RST" at 206.154,75.562 h1 r180; Top Overlay "RXD" at 206.154,78.102 h1 r180; Top Overlay "TXD" at 206.154,80.642 h1 r180
XL1: Top Overlay "DC-DC" at 172.458,94.607 h3 r270; Top Overlay "XL4015" at 186.458,94.607 h3 r270; Top Overlay "IN+" at 190.442,107.107 h2.03 r270; Top Overlay "OUT+" at 190.942,73.607 h2.03 r270; Top Overlay "IN-" at 170.442,107.107 h2.03 r270; Top Overlay "OUT-" at 170.942,73.607 h2.03 r270; Top Overlay "4-38VDC" at 180.942,111.606 h2.03 r270; Top Overlay "1.25-36VDC" at 181.942,80.607 h2.03 r270; Top Overlay "5A" at 178.942,67.607 h2.03 r270